# Altium PCB PCB_esp32_pico d4 video_2022-03-13.pcbdoc
Units mil, origin at the board's own origin, x right, y up, seen from the top; angles counter-clockwise.
Board outline 1563.97 x 1611.96 mil, 2 copper layers (Top Layer, Bottom Layer); 44 components, 29 nets, 173 pads, 13 vias.
Unrouted connection lines stored in the file: 100.
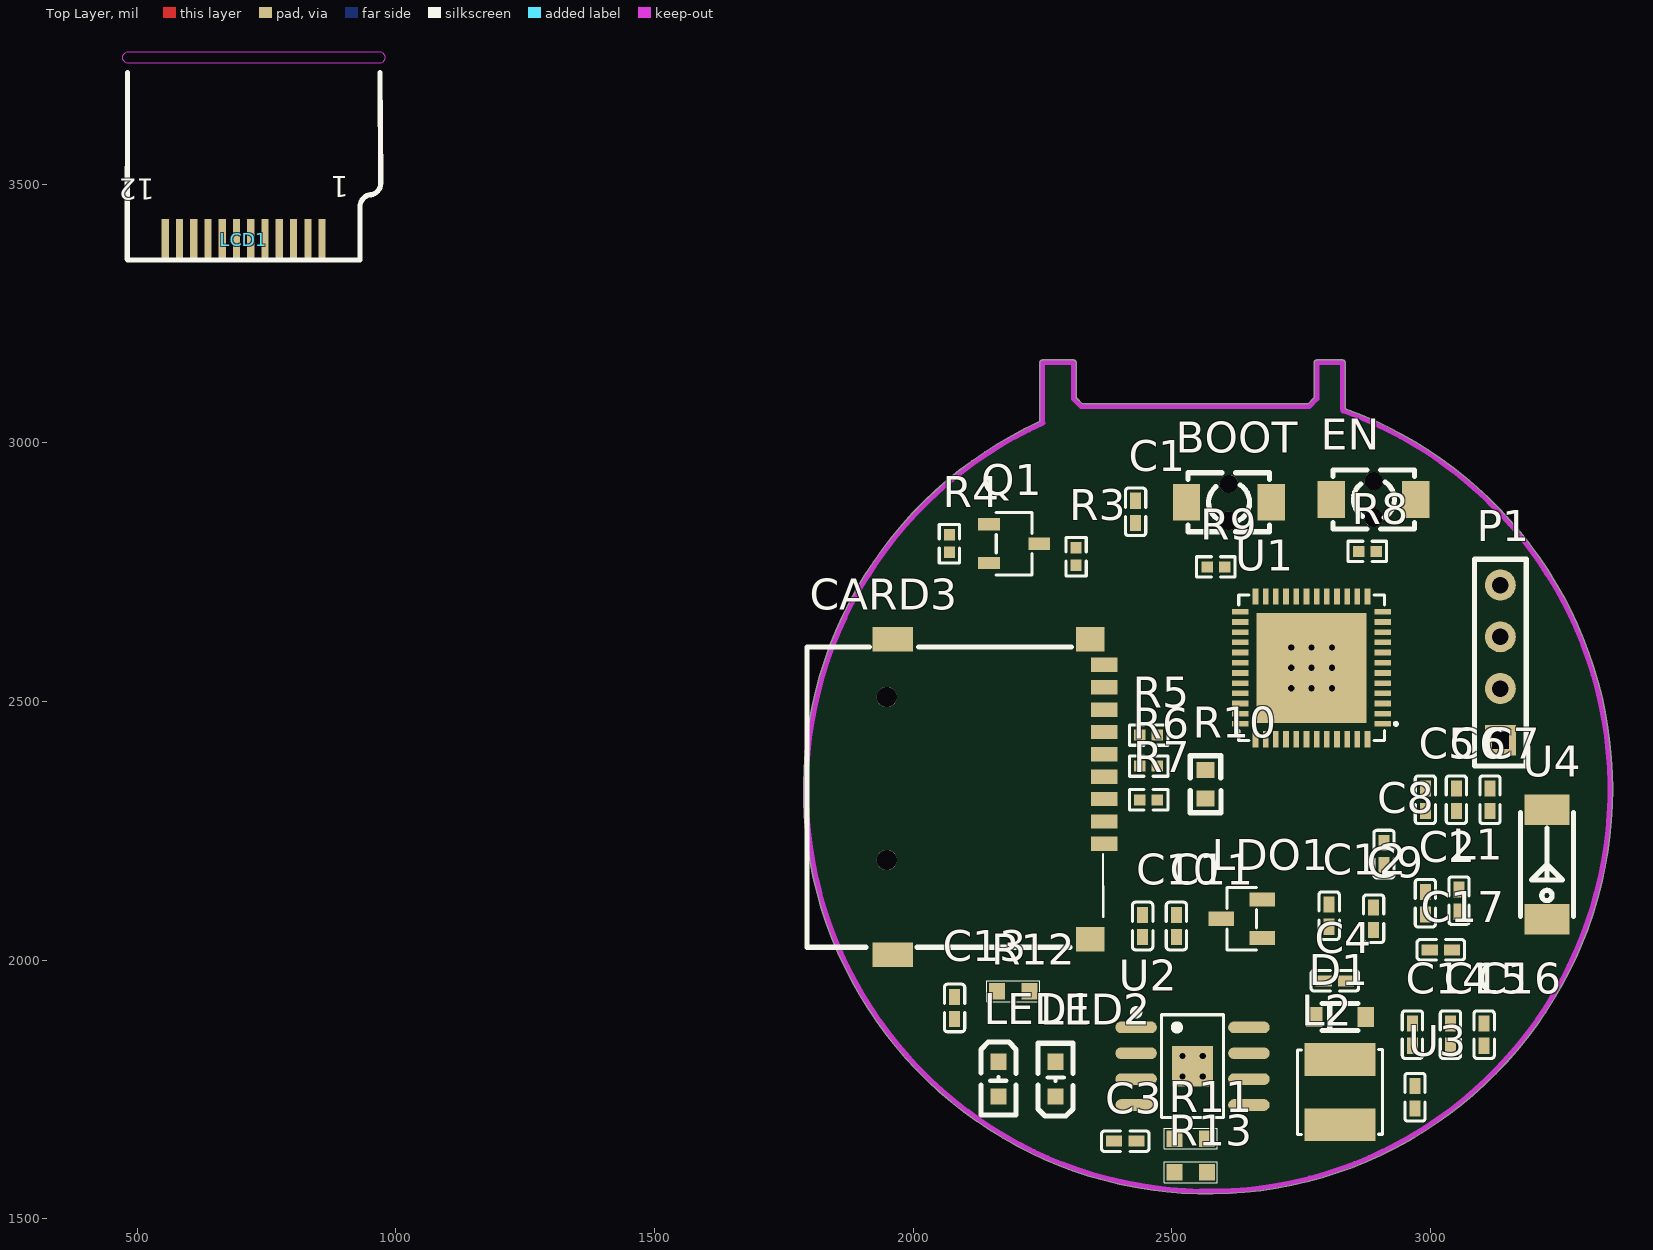
[diagram p0: Top Layer view]
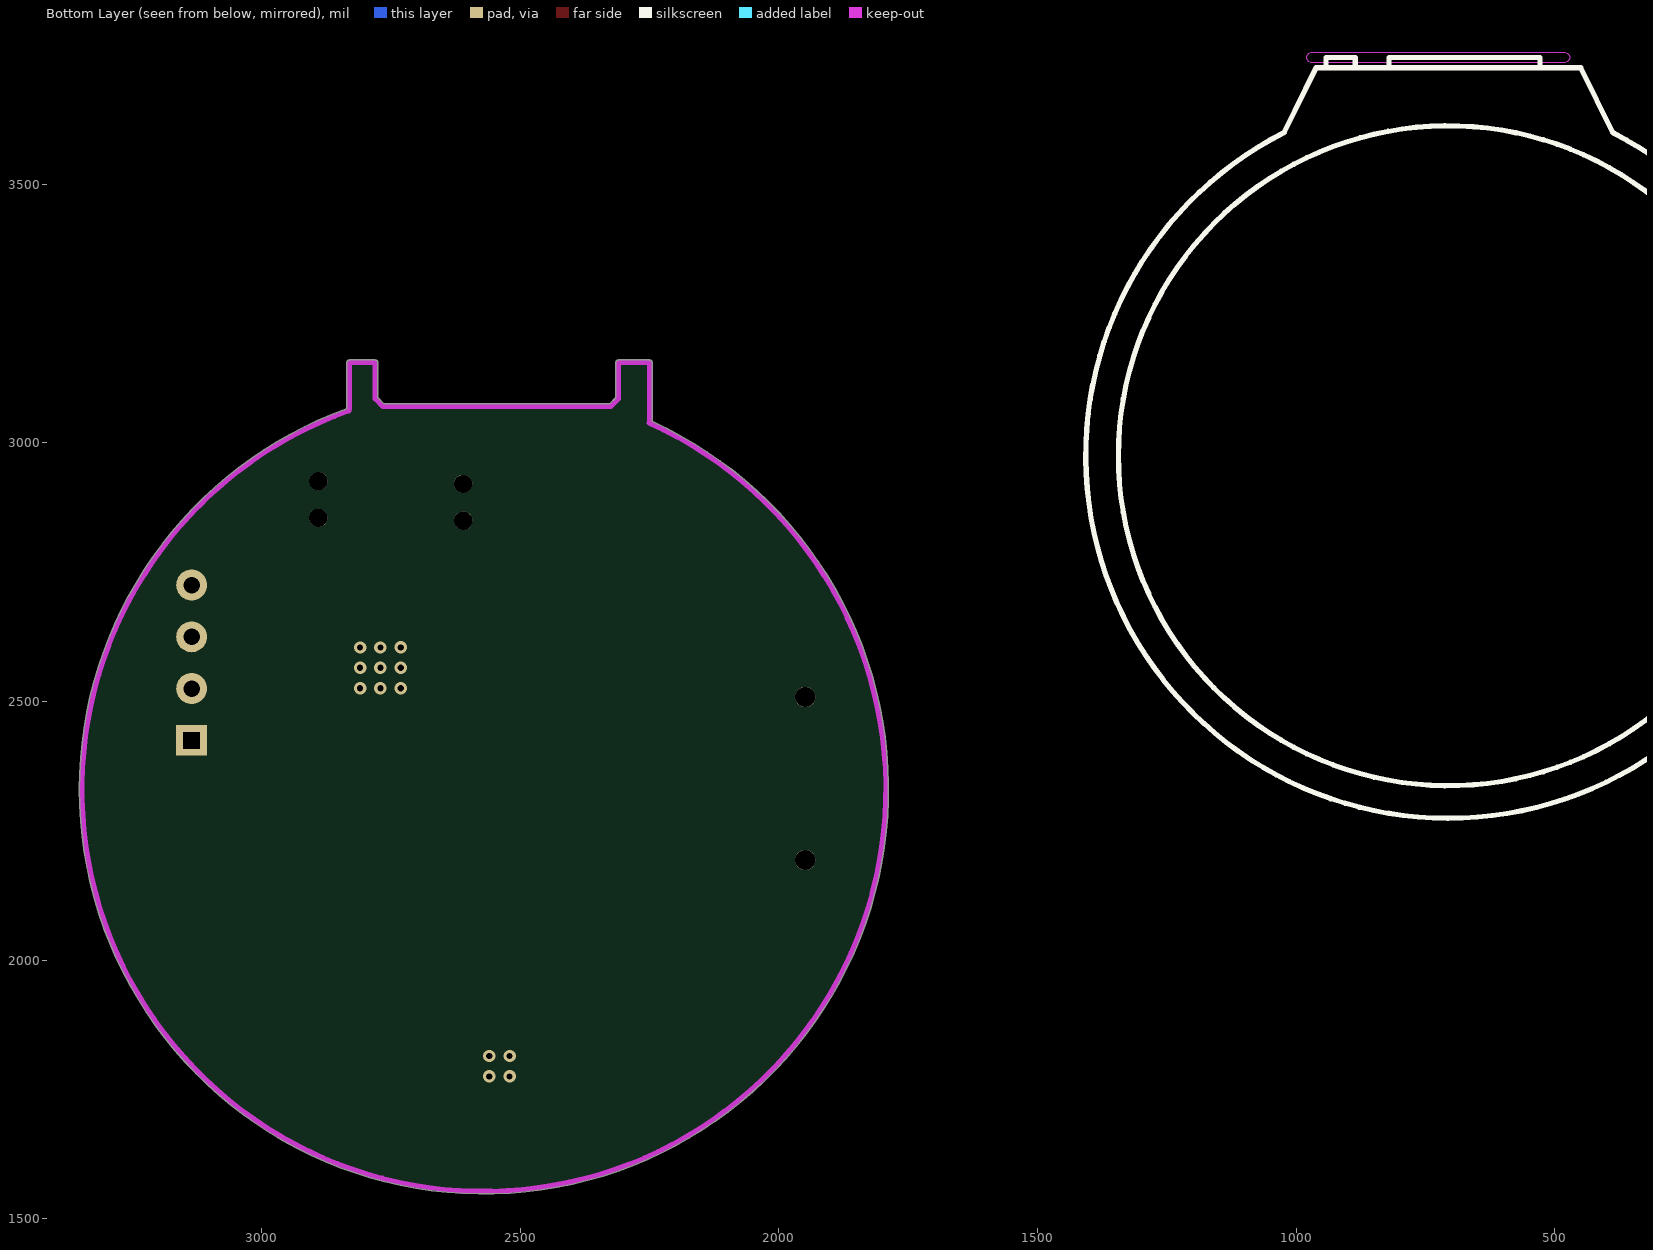
[diagram p1: Bottom Layer view, seen from below]

## Layer stack, top to bottom
Top Solder: solder mask 0.4, Solder Resist, Dk 3.5
Top Layer: signal copper 1.4
Dielectric1: dielectric 12.6, FR-4, Dk 4.8
Bottom Layer: signal copper 1.4
Bottom Solder: solder mask 0.4, Solder Resist, Dk 3.5

## Board outline
2244.99,3041.28 2244.99,3155 cw(c2250,3155) 2250,3160.01 2310,3160.01 cw(c2310,3155) 2315.01,3155 2315.01,3087.08 2327.08,3075.01 2762.92,3075.01 2774.99,3087.08 2774.99,3155 cw(c2780,3155) 2780,3160.01 2830,3160.01 cw(c2830,3155) 2835.01,3155 2835.01,3065.74 cw(c2570,2330) 3352.02,2330 cw(c2570,2330)

## Design rules (kind name [scope] priority, off if disabled: settings)
Clearance [All] p1: gap=10 ignorepadtopadclearanceinfootprint=TRUE except(0: Arc-Hole Track-Hole SMDPad-Hole THPad-Hole Via-Hole Fill-Hole Poly-Hole Region-Hole Text-Hole)
PolygonConnect [All] p1: connectstyle=Relief reliefconductorwidth=10 reliefentries=4 polygonreliefangle="90 Angle" airgapwidth=10
RoutingVias [All] p1: holewidth=28 width=50 viastyle="Through Hole" minholewidth=28 minwidth=50 maxholewidth=28 maxwidth=50
SolderMaskExpansion [All] p1: expansion=4
Width [All] p1: maxlimit=10 minlimit=10 preferedwidth=10
30 further rules are at their usual default settings.

## Components (designator, comment, footprint, x,y, rotation, side; value= is the part's Value field where it differs from the comment)
BOOT "SW2" SW-SMD_L4.0-W2.9-P4.15-EH 2610,2885 r0 top
C1 "100nF" C0402 2430,2866.46 r90 top
C2 "2pF" C0402 2990,2110 r90 top
C3 "C0402" C0402 2410,1650 r0 top
C4 "100NF" C0402 2815,1960 r180 top
C5 "100nf" C0402 2990,2310 r90 top
C6 "10nf" C0402 3050,2310 r90 top
C7 "100nf" C0402 3115,2310 r90 top
C8 "100nf" C0402 2910,2205 r90 top
C9 "C0402" C0402 2890,2080 r90 top
C10 "C0402" C0402 2443.58,2065.99 r90 top
C11 "C0402" C0402 2508.84,2065.99 r90 top
C12 "C0402" C0402 2804.1,2085.99 r90 top
C13 "C0603" C0402 2080,1907.56 r90 top
C14 "100NF" C0402 2965,1855.99 r90 top
C15 "22UF" C0402 3038.37,1855.99 r90 top
C16 "22UF" C0402 3103.63,1855.99 r90 top
C17 "2pF" C0402 3020,2020 r0 top
CARD3 "TF-01A" TF-SMD_TF-01A 2165,2315 r90 top
D1 "1N5819" SOD-323 2825,1890 r0 top
EN "SW1" SW-SMD_L4.0-W2.9-P4.15-EH 2890,2890.43 r0 top
L1 "2.4nH" C0402 3055,2115 r270 top
L2 "10uH" IND-SMD_L4.0-W4.0 2825,1745 r90 top
LCD1 "TFT_1.28_GC9A01_CB1.6" TFT_1.28_GC9A01_CB0.8 705.9,2975 r0 bottom
LDO1 "SC662K-3.3V" SOT-23-3_L2.9-W1.3-P1.90-LS2.4-BR 2635,2080 r0 top
LED1 "BLUE" LED0603-R-RD 2165,1770 r270 top
LED2 "BLUE" LED0603-R-RD 2275,1770 r90 top
P1 "2.54-1*4P_JX" 2.54-1*4P_TIGHT_JX 3135,2575 r90 top
Q1 "AO3400A" SOT-23-3_L2.9-W1.6-P1.90-LS2.8-BR 2195,2805 r0 top
R3 "10Ω" R0402 2315,2780 r270 top
R4 "10K" R0402 2070,2805 r270 top
R5 "10K" R0402 2455,2435 r0 top
R6 "10K" R0402 2455,2375 r0 top
R7 "10K" R0402 2455,2310 r180 top
R8 "12K" R0402 2877.96,2790 r0 top
R9 "12K" R0402 2585,2760 r0 top
R10 "0Ω" R0603 2565,2340 r90 top
R11 "R0603" R_0603 2567.99,1655 r180 top
R12 "R0603" R_0603 2162.01,1940 r0 top
R13 "R0603" R_0603 2505,1590 r0 top
U1 "ESP32-PICO-D4" QFN-48_L7.0-W7.0-P0.50-BL-EP5.4 2770,2565 r90 top
U2 "TP5400" SOIC-8_L5.0-W4.0-P1.27-LS6.0-BL-EP2.0 2540,1795 r270 top
U3 "BAT" C0402 2970,1735 r270 top
U4 "CA-C03" ANT2051 3225,2185 r90 top

## Footprints (in the part's own frame and the unit in brackets; to place one, negate y for a bottom-side part, rotate by r counter-clockwise, add the part's x,y. Pads: shape width x height; smd on the part's side, far side on the other; paste and mask are expansions set on the pad)
2.54-1*4P_TIGHT_JX [mm]
  rect 1.52x1.52 hole 0.81 square: 1(-3.81,0)
  round 1.52 hole 0.81: 2(-1.27,0) 3(1.27,0) 4(3.81,0)
  silkscreen extent -5.08,-1.27 5.08,1.27
ANT2051 [mm]
  rect 1.5x2.2 smd: 1(-2.69,0) 2(2.69,0)
  silkscreen extent -2.56,-1.3 2.55,1.3
C0402 [mm]
  rect 0.79x0.54 smd: 1(-0.545,0) 2(0.545,0)
  silkscreen extent -1.17,-0.5 1.17,0.5
IND-SMD_L4.0-W4.0 [mm]
  rect 1.6x3.5 smd: 1(-1.6,0) 2(1.6,0)
  silkscreen extent -2.08,-2.1 2.08,2.1
LED0603-R-RD [mm]
  rect 0.8x0.8 smd: 1(0.851,0) 2(-0.851,0)
  silkscreen extent -1.82,-0.86 1.77,0.86
QFN-48_L7.0-W7.0-P0.50-BL-EP5.4 [mm]
  rect 0.28x0.8 smd: 1(-2.75,-3.5) 2(-2.25,-3.5) 3(-1.75,-3.5) 4(-1.25,-3.5) 5(-0.75,-3.5) 6(-0.25,-3.5) 7(0.25,-3.5) 8(0.75,-3.5) 9(1.25,-3.5) 10(1.75,-3.5) 11(2.25,-3.5) 12(2.75,-3.5) 25(2.75,3.5) 26(2.25,3.5) 27(1.75,3.5) 28(1.25,3.5) 29(0.75,3.5) 30(0.25,3.5) 31(-0.25,3.5) 32(-0.75,3.5) 33(-1.25,3.5) 34(-1.75,3.5) 35(-2.25,3.5) 36(-2.75,3.5)
  rect 0.8x0.28 smd: 13(3.5,-2.75) 14(3.5,-2.25) 15(3.5,-1.75) 16(3.5,-1.25) 17(3.5,-0.75) 18(3.5,-0.25) 19(3.5,0.25) 20(3.5,0.75) 21(3.5,1.25) 22(3.5,1.75) 23(3.5,2.25) 24(3.5,2.75) 37(-3.5,2.75) 38(-3.5,2.25) 39(-3.5,1.75) 40(-3.5,1.25) 41(-3.5,0.75) 42(-3.5,0.25) 43(-3.5,-0.25) 44(-3.5,-0.75) 45(-3.5,-1.25) 46(-3.5,-1.75) 47(-3.5,-2.25) 48(-3.5,-2.75)
  rect 5.4x5.4 smd: 49(0,0)
  silkscreen extent -3.58,-4.21 3.58,3.58
R0402 [mm]
  rect 0.566x0.54 smd: 1(-0.433,0) 2(0.433,0)
  silkscreen extent -0.94,-0.5 0.94,0.5
R0603 [mm]
  rect 0.8x0.9 smd: 1(0.7,0) 2(-0.7,0)
  silkscreen extent -1.4,-0.76 1.4,0.75
R_0603 [mm]
  rect 0.8x0.8 smd: 1(0,0) 2(1.6,0)
  silkscreen extent -0.51,-0.51 2.11,0.51
SOD-323 [mm]
  rect 0.8x1 smd: 1(1.27,0) 2(-1.27,0)
  silkscreen extent -0.89,-0.66 0.89,0.66
SOIC-8_L5.0-W4.0-P1.27-LS6.0-BL-EP2.0 [mm]
  oval 0.574x2.038 smd: 1(-1.905,-2.769) 2(-0.635,-2.769) 3(0.635,-2.769) 4(1.905,-2.769) 5(1.905,2.769) 6(0.635,2.769) 7(-0.635,2.769) 8(-1.905,2.769)
  rect 2x2 smd: 9(0,0)
  silkscreen extent -2.79,-2.92 2.53,1.52
SOT-23-3_L2.9-W1.3-P1.90-LS2.4-BR [mm]
  rect 1.25x0.7 smd: 1(1,-0.95) 2(1,0.95) 3(-1,0)
  silkscreen extent -0.73,-1.53 0.73,1.53
SOT-23-3_L2.9-W1.6-P1.90-LS2.8-BR [mm]
  rect 1.07x0.6 smd: 1(-1.235,0.95) 2(-1.235,-0.95) 3(1.235,0)
  silkscreen extent -0.88,-1.54 0.88,1.54
SW-SMD_L4.0-W2.9-P4.15-EH [mm]
  rect 1.35x1.8 smd: 1(2.075,0) 2(-2.075,0)
  round 0.9 hole 0.9 unplated: ""(0,-0.9) ""(0,0.9)
  silkscreen extent -2,-1.45 2,1.45
TF-SMD_TF-01A [mm]
  rect 0.7x1.3 smd: 1(-2.292,-5.2) 2(-1.192,-5.198) 3(-0.096,-5.2) 4(1.004,-5.2) 5(2.103,-5.2) 6(3.201,-5.2) 7(4.297,-5.2) 8(5.395,-5.2) 9(6.499,-5.2)
  rect 1.2x1.397 smd: 10(7.747,-4.502) 13(-6.985,-4.502)
  rect 1.2x2 smd: 11(7.747,5.2) 12(-7.747,5.2)
  round 1 hole 1 unplated: ""(-3.084,5.487) ""(4.915,5.49)
  silkscreen extent -7.37,-5.14 7.37,9.4
TFT_1.28_GC9A01_CB0.8 [mm]
  rect 0.35x2 smd far side: 1(3.85,-10.61) 2(3.15,-10.61) 3(2.45,-10.61) 4(1.75,-10.61) 5(1.05,-10.61) 6(0.35,-10.61) 7(-0.35,-10.61) 8(-1.05,-10.61) 9(-1.75,-10.61) 10(-2.45,-10.61) 11(-3.15,-10.61) 12(-3.85,-10.61)
  Keep-Out Layer board cut-out: -5.7,-19.3 6.7,-19.3 6.75,-19.3 6.842,-19.338 6.912,-19.408 6.95,-19.5 6.95,-19.6 6.912,-19.692 6.842,-19.762 6.75,-19.8 6.7,-19.8 6.7,-19.8 -5.7,-19.8 -5.75,-19.8 -5.842,-19.762 -5.912,-19.692 -5.95,-19.6 -5.95,-19.5 -5.912,-19.408 -5.842,-19.338 -5.75,-19.3 -5.7,-19.3 -5.7,-19.3
  silkscreen extent -17.8,-19.56 17.8,17.8

## Part data
C4 C14 C15 C16: library part C0805, "Capacitor"
C5 C6 C7 C8: library part 10uF
D1: "肖特基二极管"
LED1 LED2: library part LED_B
U2: "锂电池充放电"

## Via types
v1: diameter 24.02, hole 12, Top Layer to Bottom Layer, 9 vias
v2: diameter 24, hole 12, Top Layer to Bottom Layer, 4 vias

## Nets (pads, with @x,y where several pads share a name; then routed paths per layer and width w, separated by ;. In a path a pad name is that pad's centre, name@x,y a point inside that pad or via, vN(x,y) a via of type N, cw(c..) or ccw(c..) an arc to the next point about the centre after c; other vN are vias at no path point)
3.3V: C1.1 C5.2 C6.2 C7.2 C8.2 C9.2 C12.2 CARD3.4 LCD1.3 LCD1.4 LDO1.2 R8.2 R9.1 U1.1 U1.3 U1.4 U1.19
3V3: R10.1 U1.37 U1.43 U1.46
5V: C3.2 R11.2 R13.1
+5.0V: C4.2 C10.2 C11.2 D1.2 LDO1.3 U2.1
GND: BOOT.1 C1.2 C2.1 C4.1 C5.1 C6.1 C7.1 C8.1 C9.1 C10.1 C11.1 C12.1 C13.1 C14.2 C15.2 C16.2 C17.1 CARD3.6 CARD3.10 CARD3.11 CARD3.12 CARD3.13 EN.1 LCD1.1 LDO1.1 Q1.2 R4.2 R11.1 R12.1 U1.49 U2.7 U3.2
  other v1: 2730.62,2525.64 2769.99,2525.62 2809.38,2525.62 2730.62,2564.99 2769.99,2564.99 2809.38,2564.99 2730.62,2604.38 2769.99,2604.36 2809.38,2604.36
NetBOOT_2: BOOT.2 R9.2 U1.23
NetC2_2: C2.2 L1.1 U1.2
NetC13_2: C13.2 LED1.1 LED2.1 R13.2 U2.5
NetC14_1: C14.1 C15.1 C16.1 L2.1 U2.6 U3.1
NetC17_2: C17.2 L1.2 U4.1
NetCARD3_2: CARD3.2 U1.20
NetCARD3_3: CARD3.3 LCD1.10 R6.2 U1.21
NetCARD3_5: CARD3.5 LCD1.9 R7.2 U1.17
NetCARD3_7: CARD3.7 R5.2 U1.22
NetD1_1: D1.1 L2.2 U2.8
NetEN_2: EN.2 R8.1 U1.9
NetLCD1_2: LCD1.2 R3.1
NetLCD1_5: LCD1.5 LCD1.6 LCD1.12
NetLCD1_7: LCD1.7 U1.16
NetLCD1_8: LCD1.8 U1.34
NetLCD1_11: LCD1.11 U1.13
NetLED1_2: LED1.2 U2.2
NetLED2_2: LED2.2 U2.4
NetQ1_1: Q1.1 R4.1 U1.39
NetQ1_3: Q1.3 R3.2
NetR5_1: R5.1 R6.1 R7.1 R10.2
NetR12_2: R12.2 U2.3
NetU1_40: U1.40
NetU1_41: U1.41
pads on no net: BOOT. C3.1 CARD3. CARD3.1 CARD3.8 CARD3.9 EN. P1.1 P1.2 P1.3 P1.4 U1.5 U1.6 U1.7 U1.8 U1.10 U1.11 U1.12 U1.14 U1.15 U1.18 U1.24 U1.25 U1.26 U1.27 U1.28 U1.29 U1.30 U1.31 U1.32 U1.33 U1.35 U1.36 U1.38 U1.42 U1.44 U1.45 U1.47 U1.48 U2.9 U4.2
copper on no net:
  other v2: 2520.31,1775.31 2559.68,1775.31 2520.31,1814.68 2559.68,1814.68

## Keep-outs
Keep-Out Layer:
  lines w10: 2250,3040 2250,3155 2310,3155 2310,3085 2325,3070 2765,3070 2780,3085 2780,3155 2830,3155 2830,3065 ; 2250.73,3038.38 ccw(c2570,2330) 2830.7,3061.96

## Text inside footprints (layer, text, board x,y; h text height)
LCD1: Top Overlay "1" at 909.44,3515 h40 r180; Top Overlay "12" at 534.44,3510 h40 r180